# Allegro board 4CHOEI-1.brd
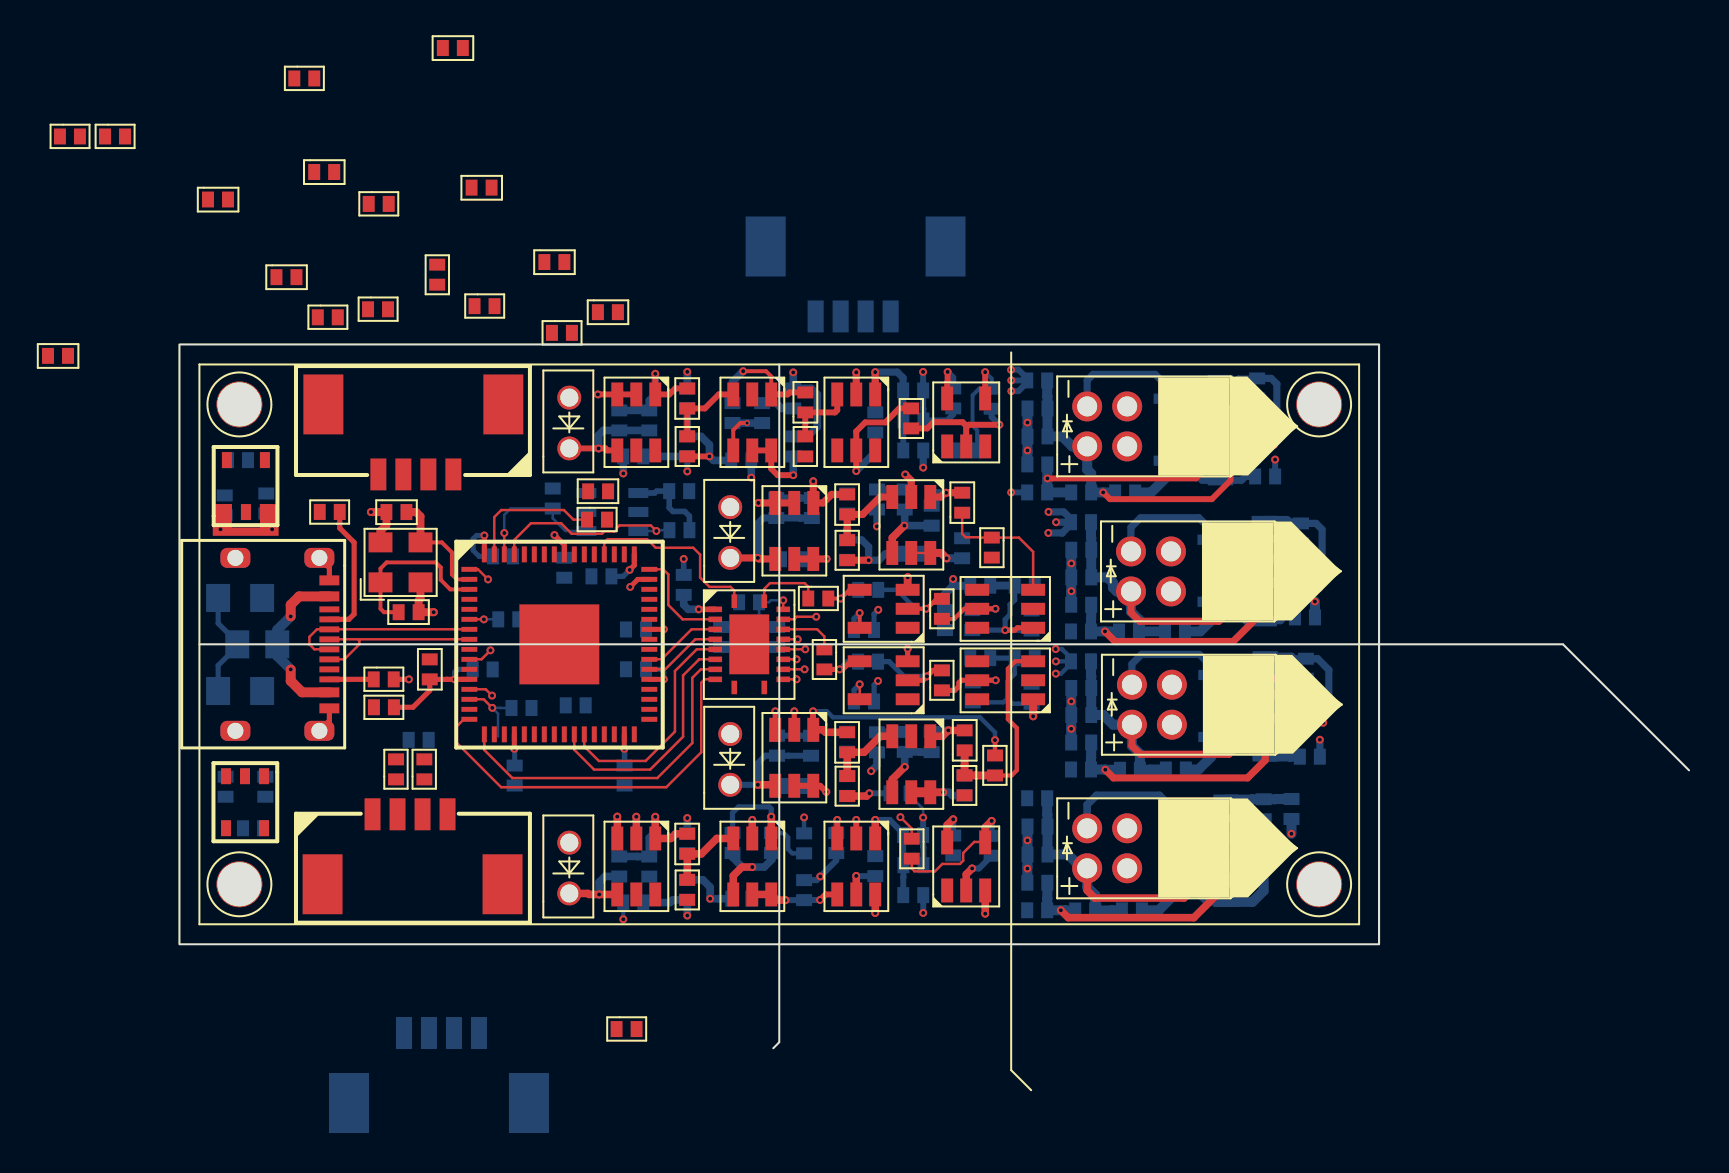
[diagram p0: board, top side]
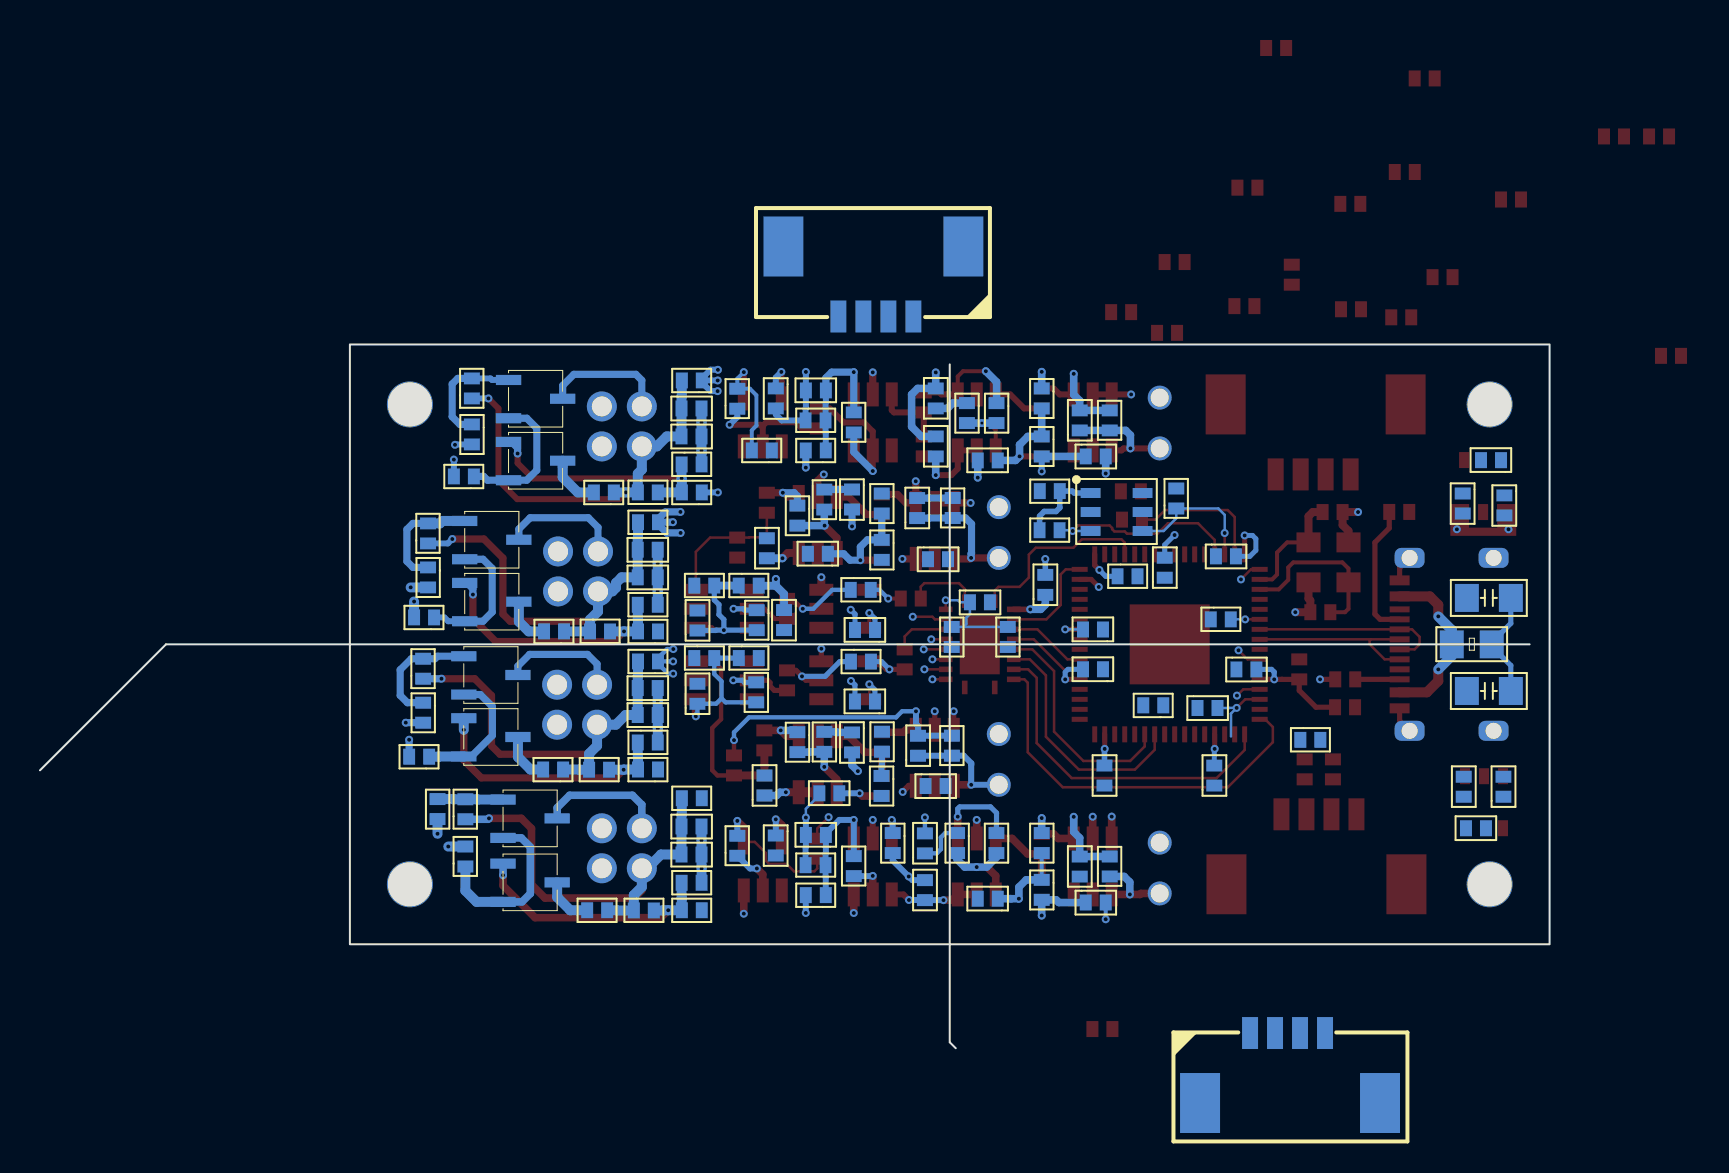
[diagram p1: board, bottom side, seen from below]

Outline 75.5 x 35.2 mm; copper layers: TOP, GND, VCC, BOTTOM. Coordinates in mm from the lower left corner of the outline.
Outline path: rectangle 0,5.2 60,35.2 ; 1,20.2 69.2,20.2 75.5,13.9 ; 30,34.2 30,0.3 29.7,0

## Design rules (mm)
constraint set DEFAULT: min track width 0.127
net group TXD_A: nets N931488 N931856 N931860 N931892 TXD_A
net group TXD_B: nets N931500 N931876 N931880 N931896 TXD_B
net group TXD_C: nets N932344 N932712 N932716 N932748 TXD_C
net group TXD_D: nets N932356 N932732 N932736 N932752 TXD_D

## Placement (name value [footprint] x y rotation side)
C1  27pF  [C0402_SMT]  10.35 26.82 0 top
C2  27pF  [C0402_SMT]  11.96 21.81 180 top
C3  0.1uF  [C0402_SMT]  21.44 27.85 180 top
C4  0.1uF  [C0402_SMT]  4.34 27.75 270 bottom
C5  0.1uF  [C0402_SMT]  2.43 29.41 0 bottom
C6  4.7uF  [C0402_SMT]  12.52 18.45 90 top
C7  0.1uF  [C0402_SMT]  17.61 17.02 180 bottom
C8  0.1uF  [C0402_SMT]  6.74 43.82 0 top
C9  4.7uF  [C0402_SMT]  18.25 39.32 0 top
C10  0.1uF  [C0402_SMT]  13.17 50.03 0 top
C11  4.7uF  [C0402_SMT]  14.61 43.04 0 top
C12  0.1uF  [C0402_SMT]  15.66 18.95 180 bottom
C13  0.1uF  [C0402_SMT]  22.34 18.95 0 bottom
C14  0.1uF  [C0402_SMT]  16.69 24.6 180 bottom
C15  0.1uF  [C0402_SMT]  16.77 13.14 90 bottom
C16  0.1uF  [C0402_SMT]  22.26 13.14 90 bottom
C17  0.1uF  [C0402_SMT]  22.34 20.95 0 bottom
C18  0.1uF  [C0402_SMT]  19.25 23.53 90 bottom
C19  0.1uF  [C0402_SMT]  25.22 22.68 90 bottom
C20  0.1uF  [C0402_SMT]  28.99 22.31 180 bottom
C21  10uF  [C0402_SMT]  45.61 24.93 180 bottom
C22  10uF  [C0402_SMT]  45.61 23.55 180 bottom
C23  10uF  [C0402_SMT]  43.41 30.6 180 bottom
C24  10uF  [C0402_SMT]  43.41 32 180 bottom
C36  DNI  [C0402_SMT]  23.5 30.9 90 bottom
C38  0.1uF  [C0402_SMT]  30.7 32 90 bottom
C39  0.1uF  [C0402_SMT]  30.7 29.6 90 bottom
C42  0.1uF  [C0402_SMT]  31.3 31.8 90 top
C44  0.1uF  [C0402_SMT]  4.85 38.57 0 top
C45  0.1uF  [C0402_SMT]  36.2 32.9 0 bottom
C46  0.1uF  [C0402_SMT]  27.6 29.4 0 bottom
C47  0.1uF  [C0402_SMT]  23.2 29.6 180 bottom
C49  0.1uF  [C0402_SMT]  25.4 33 270 top
C50  0.1uF  [C0402_SMT]  38.7 33 270 bottom
C51  0.1uF  [C0402_SMT]  31.24 9.75 90 bottom
C52  DNI  [C0402_SMT]  23.5 8.59 90 bottom
C53  0.1uF  [C0402_SMT]  31.24 7.41 90 bottom
C54  0.1uF  [C0402_SMT]  36.2 10.67 0 bottom
C56  0.1uF  [C0402_SMT]  23.2 7.29 180 bottom
C57  0.1uF  [C0402_SMT]  38.7 10.64 270 bottom
C59  0.1uF  [C0402_SMT]  -6.57 34.63 0 top
C60  0.1uF  [C0402_SMT]  25.4 10.72 270 top
C62  0.1uF  [C0402_SMT]  1.43 42.45 0 top
C63  0.1uF  [C0402_SMT]  27.6 7.48 0 bottom
C64  10uF  [C0402_SMT]  4.3 12.58 90 bottom
C65  0.1uF  [C0402_SMT]  2.31 12.58 90 bottom
C66  10uF  [C0402_SMT]  2.26 27.65 270 bottom
C67  10uF  [C0402_SMT]  3.18 11 0 bottom
C68  10uF  [C0402_SMT]  43.41 11.09 180 bottom
C69  10uF  [C0402_SMT]  43.41 9.69 180 bottom
C70  10uF  [C0402_SMT]  45.61 18.02 180 bottom
C71  10uF  [C0402_SMT]  45.61 16.67 180 bottom
C72  0.1uF  [C0402_SMT]  34.89 15.8 270 bottom
C73  DNI  [C0402_SMT]  31.59 14.63 90 bottom
C74  0.1uF  [C0402_SMT]  39.27 12.64 90 bottom
C75  0.1uF  [C0402_SMT]  42.62 17.23 90 bottom
C77  0.1uF  [C0402_SMT]  31.21 13.11 180 bottom
C78  0.1uF  [C0402_SMT]  33.74 17.34 0 bottom
C80  0.1uF  [C0402_SMT]  39.27 14.9 90 top
C81  0.1uF  [C0402_SMT]  33.4 15.8 270 top
C83  0.1uF  [C0402_SMT]  20.93 36.82 0 top
C84  0.1uF  [C0402_SMT]  35.52 12.75 0 bottom
C85  0.1uF  [C0402_SMT]  34.89 27.95 270 bottom
C86  DNI  [C0402_SMT]  31.63 26.52 90 bottom
C88  0.1uF  [C0402_SMT]  42.62 20.9 90 bottom
C89  0.1uF  [C0402_SMT]  39.15 24.51 90 bottom
C90  0.1uF  [C0402_SMT]  31.09 24.46 180 bottom
C91  0.1uF  [C0402_SMT]  33.74 20.92 0 bottom
C93  0.1uF  [C0402_SMT]  39.15 26.78 90 top
C94  0.1uF  [C0402_SMT]  33.4 27.7 270 top
C96  0.1uF  [C0402_SMT]  38.29 21.92 270 bottom
C97  0.1uF  [C0402_SMT]  36.09 24.73 0 bottom
C98  22uF  [C0805_SMT]  1.94 17.87 0 bottom
C99  22uF  [C0805_SMT]  1.94 22.52 0 bottom
F1  100mA  [R0805]  4.89 20.2 180 bottom
J2  SIP-1x4  [SMD-1D25-4P-DEG0]  13.7 28.7 180 top
J3  SIP-1x4  [SMD-1D25-4P-DEG0]  31.82 36.6 0 bottom
J4  SIP-1x4  [SMD-1D25-4P-DEG0]  14.98 0.76 180 bottom
J5  SIP-1x4  [SMD-1D25-4P-DEG0]  9.66 11.7 0 top
L1  2.2uH  [L0402_SMT]  -5.97 45.6 0 top
L2  2.2uH  [L0402_SMT]  -3.72 45.6 0 top
LD1  LaserDiode  [AXIAL_2D0_4P]  47.59 22.85 90 top
LD2  LaserDiode  [AXIAL_2D0_4P]  45.4 30.1 90 top
LD3  LaserDiode  [AXIAL_2D0_4P]  45.4 9 90 top
LD4  LaserDiode  [AXIAL_2D0_4P]  47.64 16.18 90 top
NOREF  -  [unnamed]  3 8.2 0 top
NOREF#2  -  [unnamed]  57 32.2 0 top
NOREF#3  -  [unnamed]  57 8.2 0 top
NOREF#4  -  [unnamed]  3 32.2 0 top
PD2  Photodiode  [PD-THR-2P]  19.5 30 90 top
PD3  Photodiode  [PD-THR-2P]  19.5 7.74 90 top
PD4  Photodiode  [PD-THR-2P]  27.55 13.18 90 top
PD5  Photodiode  [PD-THR-2P]  27.55 24.52 90 top
Q2  2SC1815  [SOT23-3]  54.69 26.85 270 bottom
Q3  2SC1815  [SOT23-3]  54.69 23.75 270 bottom
Q4  2SC1815  [SOT23-3]  52.5 30.8 270 bottom
Q5  2SC1815  [SOT23-3]  52.5 33.9 270 bottom
Q6  2SC1815  [SOT23-3]  52.78 9.71 270 bottom
Q7  2SC1815  [SOT23-3]  52.78 12.91 270 bottom
Q8  2SC1815  [SOT23-3]  54.74 16.98 270 bottom
Q9  2SC1815  [SOT23-3]  54.74 20.08 270 bottom
R1  2K  [R0402_SMT]  25.51 25.91 180 bottom
R2  10K  [R0402_SMT]  24.5 27.87 0 bottom
R3  10K  [R0402_SMT]  18.67 27 90 bottom
R4  10K  [R0402_SMT]  20.39 26.44 0 top
R5  12K  [R0402_SMT]  16.95 21.45 180 bottom
R6  10K  [R0402_SMT]  19.32 17.15 0 bottom
R7  DNP  [R0402_SMT]  27.1 21.07 270 bottom
R8  0  [R0402_SMT]  29.9 21.07 270 bottom
R9  5.1K  [R0402_SMT]  44.59 20.85 0 bottom
R17  10K  [R0402_SMT]  27.66 32.27 270 bottom
R20  10K  [R0402_SMT]  29.14 32.27 270 bottom
R21  100K  [R0402_SMT]  25.39 30.6 270 top
R23  4.99K  [R0402_SMT]  25.4 30.6 270 bottom
R24  100K  [R0402_SMT]  31.3 30.6 270 top
R25  4.99K  [R0402_SMT]  25.4 33 270 bottom
R27  1K  [R0402_SMT]  36.6 32 270 top
R31  DNP  [R0402_SMT]  34.8 30.8 90 bottom
R33  560  [R0402_SMT]  56.09 24.05 270 bottom
R34  510  [R0402_SMT]  56.09 25.25 90 bottom
R35  51  [R0402_SMT]  55.79 21.55 0 bottom
R38  510  [R0402_SMT]  47.99 20.85 180 bottom
R43  51  [R0402_SMT]  49.29 20.85 0 bottom
R44  510  [R0402_SMT]  45.6 22.18 180 bottom
R45  510  [R0402_SMT]  45.6 27.8 180 bottom
R46  51  [R0402_SMT]  46.8 27.8 0 bottom
R47  510  [R0402_SMT]  53.9 32.5 90 bottom
R48  5.1K  [R0402_SMT]  42.4 27.8 0 bottom
R49  510  [R0402_SMT]  43.41 29.2 180 bottom
R50  560  [R0402_SMT]  53.9 31.2 270 bottom
R51  51  [R0402_SMT]  53.8 28.6 0 bottom
R66  0  [R0402_SMT]  12.47 15.42 180 bottom
R68  DNI  [R0402_SMT]  22 30.9 90 bottom
R69  4.99K  [R0402_SMT]  36.2 29.9 0 bottom
R70  4.99K  [R0402_SMT]  37.21 31.4 180 bottom
R71  DNP  [R0402_SMT]  40.62 31.99 90 bottom
R72  10K  [R0402_SMT]  29.63 10.76 270 bottom
R73  10K  [R0402_SMT]  27.67 10.76 270 bottom
R74  4.99K  [R0402_SMT]  36.2 7.66 0 bottom
R75  4.99K  [R0402_SMT]  37.21 9.16 180 bottom
R76  DNP  [R0402_SMT]  34.8 8.61 90 bottom
R77  DNI  [R0402_SMT]  22 8.59 90 bottom
R78  1K  [R0402_SMT]  5.75 48.5 0 top
R80  DNP  [R0402_SMT]  40.62 9.63 90 bottom
R81  100K  [R0402_SMT]  32.85 10.76 270 bottom
R82  100K  [R0402_SMT]  25.39 8.42 270 top
R83  4.99K  [R0402_SMT]  25.4 8.42 270 bottom
R84  4.99K  [R0402_SMT]  25.4 10.76 270 bottom
R85  DNP  [R0402_SMT]  21.86 0.96 0 top
R86  DNP  [R0402_SMT]  21.61 23.6 180 bottom
R87  0  [R0402_SMT]  10.73 17.06 180 top
R88  5.1K  [R0402_SMT]  9.72 18.45 0 top
R89  5.1K  [R0402_SMT]  8.02 26.82 180 top
R90  DNP  [R0402_SMT]  42.4 33.4 0 bottom
R91  DNP  [R0402_SMT]  42.4 12.5 0 bottom
R92  510  [R0402_SMT]  45.8 6.89 180 bottom
R93  51  [R0402_SMT]  47.13 6.9 0 bottom
R94  510  [R0402_SMT]  54.23 11.45 90 bottom
R95  5.1K  [R0402_SMT]  42.4 6.9 0 bottom
R96  510  [R0402_SMT]  43.41 8.28 180 bottom
R97  560  [R0402_SMT]  55.62 12.46 270 bottom
R98  51  [R0402_SMT]  54.23 9.09 90 bottom
R99  510  [R0402_SMT]  48.04 13.93 180 bottom
R100  51  [R0402_SMT]  49.34 13.94 0 bottom
R101  510  [R0402_SMT]  56.34 18.48 90 bottom
R102  5.1K  [R0402_SMT]  44.59 13.94 0 bottom
R103  510  [R0402_SMT]  45.6 15.29 180 bottom
R104  560  [R0402_SMT]  56.34 17.28 270 bottom
R105  51  [R0402_SMT]  56.04 14.58 0 bottom
R106  DNP  [R0402_SMT]  44.59 26.31 0 bottom
R107  DNP  [R0402_SMT]  44.59 19.35 0 bottom
R108  DNP  [R0402_SMT]  40.79 13.64 90 top
R109  10K  [R0402_SMT]  36.27 15.82 270 bottom
R110  10K  [R0402_SMT]  37.62 15.81 270 bottom
R111  4.99K  [R0402_SMT]  40.55 19.51 180 bottom
R112  4.99K  [R0402_SMT]  42.78 19.51 180 bottom
R113  DNP  [R0402_SMT]  39.68 18.3 270 bottom
R114  DNI  [R0402_SMT]  29.89 14.63 90 bottom
R115  1K  [R0402_SMT]  38.14 17.9 90 top
R117  DNP  [R0402_SMT]  34.94 19.34 180 bottom
R118  100K  [R0402_SMT]  39.27 13.65 270 top
R119  100K  [R0402_SMT]  33.39 13.61 270 top
R120  4.99K  [R0402_SMT]  33.41 13.62 270 bottom
R121  4.99K  [R0402_SMT]  33.39 15.83 270 bottom
R122  10K  [R0402_SMT]  36.27 27.94 270 bottom
R123  10K  [R0402_SMT]  37.62 27.14 270 bottom
R124  4.99K  [R0402_SMT]  40.55 23.14 180 bottom
R125  4.99K  [R0402_SMT]  42.78 23.14 180 bottom
R126  DNP  [R0402_SMT]  39.66 21.91 270 bottom
R127  DNI  [R0402_SMT]  29.85 26.52 90 bottom
R128  1K  [R0402_SMT]  38.14 21.47 90 top
R130  DNP  [R0402_SMT]  34.95 22.93 180 bottom
R131  100K  [R0402_SMT]  40.63 25.54 270 top
R132  100K  [R0402_SMT]  33.39 25.41 270 top
R133  4.99K  [R0402_SMT]  33.4 25.43 270 bottom
R134  4.99K  [R0402_SMT]  33.4 27.75 270 bottom
R135  DNP  [R0402_SMT]  9.47 42.23 0 top
R136  DNP  [R0402_SMT]  12.89 39.19 270 top
R137  0  [R0402_SMT]  36.63 10.48 270 top
R138  0  [R0402_SMT]  38.9 29.9 0 bottom
R139  0  [R0402_SMT]  32.26 19.95 270 top
R140  0  [R0402_SMT]  31.45 22.49 0 top
R141  DNP  [R0402_SMT]  18.63 35.78 0 top
R142  DNP  [R0402_SMT]  14.76 37.12 0 top
R143  DNP  [R0402_SMT]  6.92 36.56 0 top
R144  DNP  [R0402_SMT]  9.43 36.96 0 top
R145  DNP  [R0402_SMT]  10.84 13.45 90 top
R146  DNP  [R0402_SMT]  12.25 13.45 90 top
U1  FT4232HQ-REEL  [QFN-64-EP]  19 20.2 0 top
U2  93LC56BT-I/OT  [SOT-23-6]  22.95 27.77 180 bottom
U3  TYPE-C 16PIN 2MD(073)  [USB-TYPE-C-16P-SMD-HOR]  7.5 20.2 270 top
U4  XC6220B331MR-G  [SOT-25-5]  3.33 28.12 90 top
U5  TXS0108ERGYR  [VQFN-20]  28.5 20.2 270 top
U14  TLV3501AIDBVR  [SOT-23-6-L2D9-W1D6-PD0D95-CD2D8-MM]  34.8 32.7 270 top
U15  OPA357AIDBVR  [SOT-23-6-L2D9-W1D6-PD0D95-CD2D8-MM]  29.6 32.7 270 top
U17  OPA357AIDBVR  [SOT-23-6-L2D9-W1D6-PD0D95-CD2D8-MM]  23.8 32.7 270 top
U18  SN74AHC1G14DBVR  [SOT-23-5]  38.4 30.1 90 top
U19  TLV3501AIDBVR  [SOT-23-6-L2D9-W1D6-PD0D95-CD2D8-MM]  34.8 10.49 270 top
U20  SN74AHC1G14DBVR  [SOT-23-5]  38.4 7.89 90 top
U21  OPA357AIDBVR  [SOT-23-6-L2D9-W1D6-PD0D95-CD2D8-MM]  29.6 10.49 270 top
U22  OPA357AIDBVR  [SOT-23-6-L2D9-W1D6-PD0D95-CD2D8-MM]  23.8 10.49 270 top
U23  XC6220B181MR  [SOT-25-5]  3.28 12.31 270 top
U24  TLV3501AIDBVR  [SOT-23-6-L2D9-W1D6-PD0D95-CD2D8-MM]  42.7 17.45 180 top
U25  SN74AHC1G14DBVR  [SOT-23-5]  36.42 17.45 180 top
U26  OPA357AIDBVR  [SOT-23-6-L2D9-W1D6-PD0D95-CD2D8-MM]  37.55 15.6 270 top
U27  OPA357AIDBVR  [SOT-23-6-L2D9-W1D6-PD0D95-CD2D8-MM]  31.7 15.93 270 top
U28  TLV3501AIDBVR  [SOT-23-6-L2D9-W1D6-PD0D95-CD2D8-MM]  42.7 21.03 180 top
U29  SN74AHC1G14DBVR  [SOT-23-5]  36.42 21.03 180 top
U30  OPA357AIDBVR  [SOT-23-6-L2D9-W1D6-PD0D95-CD2D8-MM]  37.55 27.57 270 top
U31  OPA357AIDBVR  [SOT-23-6-L2D9-W1D6-PD0D95-CD2D8-MM]  31.7 27.27 270 top
Y1  CRYSTAL-12.0MHz  [SMD2520-4P]  11.06 24.34 0 top

## Library data of the parts
C1-C24 C36 C38 C39 C42 C44-C47 C49-C54 C56 C57 C59 C60 C62-C75 C77 C78 C80 C81 C83-C86 C88-C91 C93 C94 C96-C99 = CAP NP
F1 = FUSE
J2-J5 = SIP-1x4
L1 L2 = INDUCTOR
LD1-LD4 = LaserDiode
PD2-PD5 = Photodiode
Q2-Q9 = 2SC1815
R1-R8 R17 R20 R21 R23-R25 R27 R31 R66 R68-R78 R80-R89 R108-R115 R117-R128 R130-R146 = R
R9 R33 R34 R38 R44 R45 R47-R50 R92 R94-R97 R99 R101-R104 = R: signal model: DEFAULT_RESISTOR_510.000000OHM_2_1
R35 R43 R46 R51 R90 R91 R93 R98 R100 R105-R107 = R: signal model: DEFAULT_RESISTOR_40.000000OHM_2_1
U1 = FT4232HQ-REEL
U2 = 93LC56BT-I/OT
U3 = USB-TYPE-C
U4 = XC6220B331MR-G
U5 = TXS0108ERGYR
U14 U19 U24 U28 = TLV3501AIDBVR
U15 U17 U21 U22 U26 U27 U30 U31 = OPA357AIDBVR
U18 U20 U25 U29 = SN74AHC1G14DBVR
U23 = XC6220B181MR
Y1 = CRYSTAL

## Footprints (pads in the part's own frame, mm; a bottom-side part is the same pattern mirrored in y, then rotated)
AXIAL_2D0_4P
  round 1.5 hole 1: 1(0,0) 2(2,0) 3(0,-2) 4(2,-2)
C0402_SMT
  rect 0.6x0.8 smd: 1(0,0) 2(1,0)
C0805_SMT
  rect 1.2x1.4 smd: 1(0,0) 2(2.2,0)
L0402_SMT
  rect 0.6x0.8 smd: 1(0,0) 2(1,0)
PD-THR-2P
  round 1.2 hole 0.9: 1(0,0) 2(2.54,0)
QFN-64-EP
  rect 0.8x0.25 smd: 1(-4.5,3.75) 2(-4.5,3.25) 3(-4.5,2.75) 4(-4.5,2.25) 5(-4.5,1.75) 6(-4.5,1.25) 7(-4.5,0.75) 8(-4.5,0.25) 9(-4.5,-0.25) 10(-4.5,-0.75) 11(-4.5,-1.25) 12(-4.5,-1.75) 13(-4.5,-2.25) 14(-4.5,-2.75) 15(-4.5,-3.25) 16(-4.5,-3.75) 33(4.5,-3.75) 34(4.5,-3.25) 35(4.5,-2.75) 36(4.5,-2.25) 37(4.5,-1.75) 38(4.5,-1.25) 39(4.5,-0.75) 40(4.5,-0.25) 41(4.5,0.25) 42(4.5,0.75) 43(4.5,1.25) 44(4.5,1.75) 45(4.5,2.25) 46(4.5,2.75) 47(4.5,3.25) 48(4.5,3.75)
  rect 0.25x0.8 smd: 17(-3.75,-4.5) 18(-3.25,-4.5) 19(-2.75,-4.5) 20(-2.25,-4.5) 21(-1.75,-4.5) 22(-1.25,-4.5) 23(-0.75,-4.5) 24(-0.25,-4.5) 25(0.25,-4.5) 26(0.75,-4.5) 27(1.25,-4.5) 28(1.75,-4.5) 29(2.25,-4.5) 30(2.75,-4.5) 31(3.25,-4.5) 32(3.75,-4.5) 49(3.75,4.5) 50(3.25,4.5) 51(2.75,4.5) 52(2.25,4.5) 53(1.75,4.5) 54(1.25,4.5) 55(0.75,4.5) 56(0.25,4.5) 57(-0.25,4.5) 58(-0.75,4.5) 59(-1.25,4.5) 60(-1.75,4.5) 61(-2.25,4.5) 62(-2.75,4.5) 63(-3.25,4.5) 64(-3.75,4.5)
  rect 4x4 smd: 65(0,0)
R0402_SMT
  rect 0.6x0.8 smd: 1(0,0) 2(1,0)
R0805
  rect 1.2x1.4 smd: 1(0,0) 2(2,0)
SMD2520-4P
  rect 1.2x1 smd: 1(-1,-1.04) 2(1,-1.04) 3(1,0.96) 4(-1,0.96)
SMD-1D25-4P-DEG0
  rect 0.8x1.6 smd: 1(0,0) 2(1.25,0) 3(2.5,0) 4(3.75,0)
  rect 2x3 smd: 5(6.5,-3.5) 6(-2.5,-3.5)
SOT23-3
  rect 0.51x1.27 smd: 1(0.476,0.434) 2(2.391,0.434) 3(1.415,3.142)
SOT-23-5
  rect 1.2x0.6 smd: 1(0,0) 2(0,-0.95) 3(0,-1.9) 4(2.4,-1.9) 5(2.4,0)
SOT-23-6
  rect 1x0.5 smd: 1(0,0) 2(0,-0.95) 3(0,-1.9) 4(2.6,-1.9) 5(2.6,-0.95) 6(2.6,0)
SOT-23-6-L2D9-W1D6-PD0D95-CD2D8-MM
  rect 1.2x0.6 smd: 1(0,0) 2(0,-0.95) 3(0,-1.9) 4(2.8,-1.9) 5(2.8,-0.95) 6(2.8,0)
SOT-25-5
  rect 0.8x0.5 smd: 1(-1.3,0.95) 2(-1.3,0) 3(-1.3,-0.95) 4(1.3,-0.95) 5(1.3,0.95)
unnamed
  round 2.3 hole 2.2 unplated: (0,0)
USB-TYPE-C-16P-SMD-HOR
  rect 0.5x1 smd: 1(-3.2,0) 2(-2.4,0) 11(2.4,0) 12(3.2,0)
  rect 0.3x1 smd: 3(-1.75,0) 4(-1.25,0) 5(-0.75,0) 6(-0.25,0) 7(0.25,0) 8(0.75,0) 9(1.25,0) 10(1.75,0)
  rrect 1x1.5 hole 0.8: 13(4.325,-0.5) 14(4.325,-4.7) 15(-4.325,-4.7) 16(-4.325,-0.5)
VQFN-20
  rect 0.68x0.28 smd: 1(-2.157,-0.75) 10(2.158,-0.75) 11(2.158,0.75) 20(-2.157,0.75)
  rect 0.28x0.68 smd: 2(-1.75,-1.7) 3(-1.25,-1.7) 4(-0.75,-1.7) 5(-0.25,-1.7) 6(0.25,-1.7) 7(0.75,-1.7) 8(1.25,-1.7) 9(1.75,-1.7) 12(1.75,1.7) 13(1.25,1.7) 14(0.75,1.7) 15(0.25,1.7) 16(-0.25,1.7) 17(-0.75,1.7) 18(-1.25,1.7) 19(-1.75,1.7)
  rect 3x2 smd: EPAD(0,0)

## Nets
GND: C1.1 C2.1 C3.1 C4.1 C5.2 C6.2 C7.1 C8.1 C9.1 C10.1 C11.1 C12.1 C13.1 C14.1 C15.1 C16.1 C17.1 C18.1 C19.2 C20.2 C21.2 C22.2 C23.2 C24.2 C38.2 C39.2 C44.2 C45.2 C46.2 C47.2 C50.2 C51.2 C53.2 C54.2 C56.2 C57.2 C62.2 C63.2 C64.1 C65.1 C66.1 C67.1 C68.2 C69.2 C70.2 C71.2 C72.2 C74.2 C75.2 C77.2 C78.2 C83.2 C84.2 C85.2 C88.2 C89.2 C90.2 C91.2 C96.2 C97.2 C98.2 C99.2 J2.4 J2.5 J2.6 J3.4 J3.5 J3.6 J4.4 J4.5 J4.6 J5.4 J5.5 J5.6 PD2.2 PD3.2 PD4.2 PD5.2 R5.1 R24.2 R25.1 R33.2 R35.2 R44.2 R49.2 R50.2 R51.2 R66.1 R70.1 R75.1 R81.2 R84.1 R88.2 R89.2 R96.2 R97.2 R98.2 R103.2 R104.2 R105.2 R112.1 R118.2 R121.1 R125.1 R131.2 R134.1 U1.1 U1.5 U1.10 U1.11 U1.15 U1.25 U1.35 U1.47 U1.51 U1.65 U2.2 U3.1 U3.12 U3.13 U3.14 U3.15 U3.16 U4.2(VSS) U5.11 U5.EPAD U14.2(V-) U14.6 U15.2(V-) U17.2(V-) U17.3 U18.3 U19.2(V-) U19.6 U20.3 U21.2(V-) U22.2(V-) U22.3 U23.2(VSS) U24.2(V-) U24.6 U25.3 U26.2(V-) U27.2(V-) U27.3 U28.2(V-) U28.6 U29.3 U30.2(V-) U31.2(V-) U31.3 Y1.2 Y1.4
VBUS: C4.2 C64.2 C65.2 C66.2 C98.1 C99.1 F1.2 U4.1 U4.3 U23.1 U23.3
VBUSIN: F1.1 U3.2 U3.11(VBUS2)
VDD18: C6.1 C12.2 C13.2 C14.2 R7.2 R86.2 R87.1 U1.12 U1.37 U1.64
VDD33: C3.2 C5.1 C15.2 C16.2 C17.2 C18.2 C19.1 C39.1 C44.1 C47.1 C50.1 C53.1 C56.1 C57.1 C62.1 C74.1 C77.1 C78.1 C83.1 C89.1 C90.1 C91.1 C96.1 J2.1 J3.1 J4.1 J5.1 L1.1 L2.1 R2.2 R3.2 R4.2 R6.2 R8.2 R23.2 R69.2 R74.2 R83.2 R90.1 R91.1 R106.1 R107.1 R111.2 R120.2 R124.2 R133.2 U1.20 U1.31 U1.42 U1.50 U1.56 U2.6(VCC) U4.5 U5.2 U5.10 U14.4 U15.5 U15.6 U17.5 U17.6 U18.5 U19.4 U20.5 U21.5 U21.6 U22.5 U22.6 U24.4 U25.5 U26.5 U26.6 U27.5 U27.6 U28.4 U29.5 U30.5 U30.6 U31.5 U31.6
RXD_A: R136.2 R137.1 U5.12
RXD_B: R138.1 R144.2 U5.15
RXD_C: R139.1 R142.2 U5.17
RXD_D: R140.1 R146.2 U5.20
RXDA: U1.17 U5.8
RXDB: U1.27 U5.6
RXDC: U1.39 U5.4
RXDD: U1.52 U5.1
TXD_A: R95.1 R135.2 U5.13
TXD_B: R48.1 R143.2 U5.14
TXD_C: R102.1 R141.2 U5.16
TXD_D: R9.1 R145.2 U5.18
TXDA: U1.16 U5.9
TXDB: U1.26 U5.7
TXDC: U1.38 U5.5
TXDD: U1.48 U5.3
N00582: R4.1 U1.63 U2.5
N00604: R3.1 U1.62 U2.4
N00616: R1.2 U1.61 U2.3
N00760: R1.1 R2.1 U2.1
N01302: U1.8 U3.6 U3.8
N01314: U1.7 U3.5 U3.7
N01942: R86.1 U1.49(VREGOUT)
N02617: R5.2 U1.6
N02788: C7.2 R6.1 U1.14
N03863: C8.2 C9.2 L1.2 U1.9
N03880: C10.2 C11.2 L2.2 U1.4
N15178: C20.1 R7.1 R8.1 U5.19(VCCB)
N619829: R66.2 U1.13
N625108: C36.1 PD2.1 R68.1 U17.4
N625141: C36.2 C49.1 R68.2 U17.1
N797485: R17.2 R20.2 U15.4
N797493: C42.2 R17.1 U15.1
N797585: C45.1 R31.2 R69.1 R70.2 U14.1
N797593: R27.1 R31.1 U14.5
N797877: C42.1 R24.1 U14.3
N797953: C49.2 R21.1 U15.3
N798113: C46.1 R21.2 R23.1 R25.2
N804959: C38.1 R20.1
N809789: R27.2 R71.1 U18.2
N814486: R71.2 R138.2 U18.4(Y)
N820703: C51.1 R72.1
N820707: R72.2 R73.2 U21.4
N820719: C59.2 R73.1 U21.1
N820731: C54.1 R74.1 R75.2 R76.2 U19.1
N820747: C52.1 PD3.1 R77.1 U22.4
N820755: C52.2 C60.1 R77.2 R85.2 U22.1
N820875: R76.1 R78.1 U19.5
N821237: R78.2 R80.1 U20.2
N821249: R80.2 R137.2 U20.4(Y)
N821327: C59.1 R81.1 R85.1 U19.3
N821379: C60.2 R82.1 U21.3
N821555: C63.1 R82.2 R83.1 R84.2
N830568: C67.2 R87.2 U23.5
N884584: R89.1 U3.4
N886048: R88.1 U3.10
N887669: C1.2 U1.2 Y1.3
N887689: C2.2 U1.3 Y1.1
N909852: C73.2 C81.1 R108.2 R114.2 U27.1
N909860: C80.1 R108.1 R118.1 U24.3
N909984: C72.1 R109.1
N909988: R109.2 R110.2 U26.4
N910000: C80.2 R110.1 U26.1
N910012: C75.1 R111.1 R112.2 R113.2 U24.1
N910028: C73.1 PD4.1 R114.1 U27.4
N910156: R113.1 R115.1 U24.5
N910546: R115.2 R117.1 U25.2
N910558: R117.2 R139.2 U25.4(Y)
N910688: C81.2 R119.1 U26.3
N910864: C84.1 R119.2 R120.1 R121.2
N911060: C85.1 R122.1
N911064: R122.2 R123.2 U30.4
N911076: C93.2 R123.1 U30.1
N911088: C88.1 R124.1 R125.2 R126.2 U28.1
N911104: C86.1 PD5.1 R127.1 U31.4
N911112: C86.2 C94.1 R127.2 U31.1
N911232: R126.1 R128.1 U28.5
N911614: R128.2 R130.1 U29.2
N911626: R130.2 R140.2 U29.4(Y)
N911704: C93.1 R131.1 U28.3
N911756: C94.2 R132.1 U30.3
N911932: C97.1 R132.2 R133.1 R134.2
N931488: C68.1 C69.1 LD3.1 R91.2 R92.1 R93.1 R94.1
N931500: C23.1 C24.1 LD2.1 R45.1 R46.1 R47.1 R90.2
N931812: LD3.2 Q7.3
N931828: LD2.2 Q5.3
N931856: Q6.1 R92.2 R95.2 R96.1
N931860: Q6.3 R93.2
N931876: Q4.1 R45.2 R48.2 R49.1
N931880: Q4.3 R46.2
N931892: Q7.1 R94.2 R97.1
N931896: Q5.1 R47.2 R50.1
N932124: Q6.2(E) Q7.2(E) R98.1
N932164: Q4.2(E) Q5.2(E) R51.1
N932344: C70.1 C71.1 LD4.1 R99.1 R100.1 R101.1 R107.2
N932356: C21.1 C22.1 LD1.1 R34.1 R38.1 R43.1 R106.2
N932668: LD4.2 Q9.3
N932684: LD1.2 Q2.3
N932712: Q8.1 R99.2 R102.2 R103.1
N932716: Q8.3 R100.2
N932732: Q3.1 R9.2 R38.2 R44.1
N932736: Q3.3 R43.2
N932748: Q9.1 R101.2 R104.1
N932752: Q2.1 R33.1 R34.2
N932980: Q8.2(E) Q9.2(E) R105.1
N933020: Q2.2(E) Q3.2(E) R35.1
N943640: J2.2 R135.1
N943662: J2.3 R136.1
N943770: J3.2 R141.1
N943792: J3.3 R142.1
N945293: J4.2 R143.1
N945315: J4.3 R144.1
N945423: J5.2 R145.1
N945445: J5.3 R146.1

Pads without a net: LD1 3 4; LD2 3 4; LD3 3 4; LD4 3 4; U1 18 19 21 22 23 24 28 29 30 32 33 34 36 40 41 43 44 45 46 53 54 55 57 58 59 60; U3 3 9; U4 4; U18 1; U20 1; U23 4; U25 1; U29 1

## Via types
v1: diameter 0.4, hole 0.2, TOP to BOTTOM, 153 vias
v2: diameter 0.3, hole 0.15, TOP to BOTTOM, 1 via

## Routing (per net, layer and track width the routed paths; a pad name or vN(x,y) marks a point on that pad's centre or on a via; arc(x,y) is an arc through that point)
GND: length 70.3
  TOP w0.127: U1.10 15.11,19.45 v1(15.56,19.9) ; U1.1 14.94,23.95 v1(15.44,23.45)
  TOP w0.25: v1(22.55,23.07) 22.93,23.45 U1.47
  TOP w0.26: 29.8,15.93 v1(29.8,16.85) ; U3.16 7.5,24.03 U3.1 ; R88.2 v1(11.48,18.45) ; U25.3 v1(36.42,19.98) ; U3.12 7.5,16.38 U3.13 ; U27.2 v1(30.75,16.85)
  TOP w0.3: v1(20.93,32.7) U17.3 U17.2 ; U19.2 v1(33.85,11.42)
  TOP w0.36: v1(36.3,28.7) 36.6,28.4 U30.2 ; U14.2 v1(33.85,33.81) ; U31.2 v1(28.96,27.27)
  TOP w0.38: U19.6 v1(34.8,6.77) ; U22.2 v1(22.85,11.58) ; U22.3 v1(21.9,11.59) ; U20.3 v1(40.3,6.73) ; U21.2 v1(28.65,11.42)
  TOP w0.4: v1(9.58,26.82) C1.1 10.35,26.17 10.06,25.87 Y1.4 ; 36.42,22.93 v1(36.42,23.56) ; Y1.2 12.06,22.49 11.96,22.4 C2.1 v1(12.72,21.81)
  BOTTOM w0.127: v1(37.2,11.54) 37.2,11.98 36.52,12.65 C84.2 ; R44.2 44.6,22.19
  BOTTOM w0.2: C56.2 v1(22.2,6.45)
  BOTTOM w0.22: C51.2 v1(31.24,11.54)
  BOTTOM w0.26: v1(34.95,21.93) 34.74,21.71 C91.2 ; C78.2 34.74,18.17 v1(34.94,18.37)
  BOTTOM w0.28: C19.2 v1(25.22,24.47)
  BOTTOM w0.3: C53.2 31.87,8.41 v1(32.05,8.59) 32.85,9.39 R81.2 ; C50.2 38.7,31.7 38.4,31.4 R70.1 37.21,31.99 37.2,32.01 C45.2 v1(37.2,33.83) ; R75.1 37.21,10.06 37.2,10.08 C54.2 v1(37.2,11.54) ; v1(54.75,30.18) 54.73,30.2 R50.2 ; R51.2 v1(54.8,29.44)
  BOTTOM w0.36: R105.2 v1(57.04,15.43) ; C85.2 v1(34.89,26.1) ; R104.2 v1(57.21,16.28)
  BOTTOM w0.38: R25.1 v1(25.4,33.83) ; R84.1 v1(25.4,11.51) ; C72.2 34.89,14.15 v1(34.59,13.86) ; C47.2 v1(22.2,28.75) ; C39.2 31.42,30.6 31.91,31.08 31.91,32.7 31.61,33 C38.2 v1(30.7,33.8) ; C46.2 v1(28.6,28.54)
  BOTTOM w0.5: C68.2 v1(42.41,10.4) C69.2 42.41,9.1 42.41,9.09 v1(42.41,8.99) R96.2 ; R98.2 v1(55.08,10.09) ; C21.2 v1(44.61,24.25) C22.2 v1(44.61,22.86) 44.61,22.78 44.6,22.78 44.6,22.19 ; R33.2 v1(56.96,23.05) ; R103.2 v1(44.6,15.98) 44.6,16.07 44.61,16.08 C71.2 v1(44.61,17.35) C70.2 ; R97.2 v1(55.62,10.73) ; R49.2 42.41,29.79 42.41,29.8 v1(42.41,29.9) C23.2 v1(42.41,31.29) C24.2 ; R35.2 v1(56.79,22.34)
VBUS: length 5.4
  BOTTOM w0.26: C99.1 1.94,21.25 2.89,20.3 F1.2 2.89,20.1 1.94,19.15 C98.1
  vias: v1(2.06,25.95) v1(4.64,25.95)
VBUSIN: length 8.6
  TOP w0.5: v1(5.57,21.6) 5.57,22.18 5.99,22.6 U3.2 ; v1(5.57,18.95) 5.57,18.37 6.14,17.8 U3.11
  BOTTOM w0.5: v1(5.57,18.95) 4.89,19.62 F1.1 4.89,20.92 v1(5.57,21.6)
VDD18: length 11.3
  TOP w0.25: U1.37 v1(24.23,18.45) ; U1.64 v1(15.25,25.65)
  TOP w0.26: R87.1 11.68,17.06 12.52,17.89 C6.1 13.38,18.45 13.38,18.45 v1(13.77,18.45) U1.12
  BOTTOM w0.25: v1(24.23,18.45) 24.23,18.81 24.09,18.95 C13.2 ; v1(15.25,25.65) 14.86,25.65 14.69,25.48 14.69,24.9 14.99,24.6 C14.2
  BOTTOM w0.26: v1(13.77,18.45) 13.77,18.82 13.9,18.95 C12.2
VDD33: length 54.3
  TOP w0.127: U30.5 U30.6 ; U25.5 v1(34.02,18.2)
  TOP w0.2: U29.5 v1(34.02,21.77)
  TOP w0.25: U1.31 v1(22.25,14.97) ; U1.56 19.25,25.17 v1(18.76,25.67) ; U1.20 v1(16.75,14.97) ; U1.42 v1(24.23,20.95)
  TOP w0.28: U5.2 v1(25.97,21.95)
  TOP w0.3: U18.5 38.4,33.31 38.42,33.33 v1(38.42,33.83) ; U27.5 U27.6 32.05,13.13 v1(32.35,12.82) ; v1(32.04,7.42) 32.32,7.69 U19.4 ; v1(30.7,28.66) 29.92,28.66 29.6,28.98 U15.6 U15.5
  TOP w0.36: U31.5 U31.6 v1(32.37,24.47)
  TOP w0.38: U21.5 U21.6 29.89,7.41 v1(30.31,7.41)
  TOP w0.4: U20.5 38.4,11.15 v1(38.7,11.45) ; v1(38.37,24.51) 38.1,24.77 U30.6 ; 37.55,12.8 v1(38.2,12.8)
  TOP w0.5: 36.6,12.8 37.55,12.8
  BOTTOM w0.127: C17.2 23.83,20.95 23.84,20.95 v1(24.23,20.95)
  BOTTOM w0.22: R107.1 44.59,19.51 44.14,19.96 v1(43.82,19.96) ; R107.1 44.59,19.24 44.09,18.73 v1(43.83,18.73) ; R107.1 v1(43.84,19.35)
  BOTTOM w0.25: v1(16.75,14.97) 16.77,14.96 C15.2 ; C18.2 19.25,25.18 v1(18.76,25.67)
  BOTTOM w0.26: v1(34.02,18.2) 33.74,17.92 C78.1 ; v1(34.02,21.77) 33.74,21.48 C91.1
  BOTTOM w0.28: v1(22.25,14.97) 22.26,14.96 C16.2
  BOTTOM w0.3: R90.1 42.4,33.3 41.97,32.87 v1(41.61,32.87) ; R90.1 v1(41.6,33.4) ; R90.1 42.4,33.5 41.96,33.94 41.6,33.94 v1(41.59,33.93) ; R23.2 v1(25.4,28.85) ; v1(30.31,7.41) C53.1 31.25,7.42 v1(32.04,7.42) ; C50.1 38.7,33.55 v1(38.42,33.83) ; R74.2 v1(37.2,6.77) ; C57.1 v1(38.7,11.45)
  BOTTOM w0.36: v1(37.2,29.04) R69.2 ; v1(43.47,26.82) 44.23,26.82 44.59,26.46 R106.1 ; R106.1 44.59,26.21 44.16,25.78 44.15,25.77 v1(43.46,25.77) ; R106.1 v1(43.85,26.31)
  BOTTOM w0.38: C47.1 R23.2 ; v1(25.4,6.64) R83.2 24.68,7.42 24.54,7.29 C56.1 ; C19.1 25.22,22.18 25.45,21.95 v1(25.97,21.95) ; C74.1 38.66,12.64 38.49,12.8 v1(38.2,12.8) ; C39.1 v1(30.7,28.66)
  BOTTOM w0.4: C96.1 38.29,22.72 38.7,23.13 ; 38.7,23.13 v1(38.7,23.47) ; 38.7,23.13 39.54,23.13 R124.2 ; v1(38.37,24.51) C89.1
RXD_A: length 2
  TOP w0.127: v1(36.06,11.56) 36.63,10.99 R137.1 ; U5.12 v1(30.87,18.45)
RXD_B: length 1.1
  TOP w0.127: U5.15 v1(31.3,19.95)
RXD_C: length 2.9
  TOP w0.127: U5.17 31.9,20.95 32.26,20.59 R139.1
RXD_D: length 3.6
  TOP w0.127: U5.20 29.25,22.97 29.54,23.26 31.27,23.26 31.45,23.08 R140.1
RXDA: length 17.1
  TOP w0.127: U5.8 26.08,18.95 25.65,18.53 25.65,15.27 23.9,13.51 16.65,13.51 15.25,14.92 U1.17
RXDB: length 11.5
  TOP w0.127: U1.27 20.25,15.1 20.98,14.37 23.32,14.37 24.78,15.84 24.78,18.86 25.87,19.95 U5.6
RXDC: length 3.9
  TOP w0.127: U5.4 25.62,20.95 24.11,19.45 U1.39
RXDD: length 9.4
  TOP w0.127: U5.1 27.75,22.89 27.56,23.08 26.51,23.08 26.04,23.54 26.04,24.69 25.7,25.03 23.82,25.03 23.39,25.46 21.42,25.46 21.25,25.29 U1.52
TXD_A: length 1.1
  TOP w0.127: U5.13 v1(31.27,18.95)
TXD_B: length 1.5
  TOP w0.127: U5.14 v1(30.87,19.45)
  BOTTOM w0.3: R48.1 v1(41.6,27.8)
TXD_C: length 0.7
  TOP w0.127: U5.16 v1(30.92,20.45)
TXD_D: length 1.7
  TOP w0.127: U5.18 30.74,21.45 30.87,21.58 v1(31.85,21.58)
TXDA: length 19.7
  TOP w0.127: U1.16 14.22,16.45 13.84,16.07 13.84,15.3 16.09,13.05 24.35,13.05 26.1,14.8 26.1,18.28 26.27,18.45 U5.9
TXDB: length 12.3
  TOP w0.127: U5.7 25.99,19.45 25.19,18.65 25.19,15.58 23.55,13.94 20.74,13.94 19.75,14.93 U1.26
TXDC: length 3.9
  TOP w0.127: U5.5 25.8,20.45 24.3,18.95 U1.38
TXDD: length 5.2
  TOP w0.127: U5.3 25.17,21.45 24.45,22.17 24.45,23.7 24.2,23.95 U1.48
N00582: length 6.8
  TOP w0.127: R4.1 19.71,26.44 19.23,26.92 16.1,26.92 15.75,26.57 U1.63
N00604: length 7
  TOP w0.127: U1.62 v1(16.25,25.77)
  BOTTOM w0.127: U2.4 19.3,25.87 18.67,26.5 R3.1 16.57,27 16.25,26.68 v1(16.25,25.77)
N00616: length 10.3
  TOP w0.127: v1(23.85,25.87) 23.58,26.15 22,26.15 21.88,26.02 21.88,25.96 21.77,25.85 21.25,25.85 21.14,25.74 19.61,25.74 19.09,26.26 17.58,26.26 16.75,25.43 U1.61
  BOTTOM w0.127: R1.2 24.02,25.91 23.98,25.87 v1(23.85,25.87) U2.3
N00760: length 4.3
  BOTTOM w0.28: R1.1 25.51,26.62 25.27,26.85 24.68,26.85 24.5,27.03 R2.1 23.87,27.87 23.78,27.77 U2.1
N01302: length 9.1
  TOP w0.127: U1.8 8.94,20.45 ; 8.94,20.45 9,20.39 9,20.2 8.25,19.45 U3.8 ; 8.94,20.45 U3.6
N01314: length 9.6
  TOP w0.127: U3.7 6.75,19.95 6.5,20.2 6.5,20.57 6.88,20.95 U3.5 U1.7
N01942: length 1.9
  TOP w0.26: U1.49 22.75,24.16 v1(22.52,23.92)
  BOTTOM w0.26: v1(22.52,23.92) 22.2,23.6 R86.1
N02617: length 1.4
  TOP w0.127: U1.6 v1(15.23,21.45)
  BOTTOM w0.127: R5.2 15.94,21.45 v1(15.23,21.45)
N02788: length 3.8
  TOP w0.127: v1(15.65,17.02) 15.22,17.45 U1.14
  BOTTOM w0.127: 15.94,15.6 15.94,16.74 v1(15.65,17.02) 16.04,17.02 16.05,17.02 C7.2
N15178: length 5.9
  TOP w0.127: U5.19 v1(30.2,22.4)
  BOTTOM w0.127: 29.31,21.07 29.17,21.21 29.17,21.54 28.99,21.71 C20.1 29.48,22.31 29.58,22.4 v1(30.2,22.4) ; 29.31,21.07 R7.1 ; 29.31,21.07 R8.1
N619829: length 1.3
  TOP w0.127: v1(15.64,17.64) 15.32,17.95 U1.13
N625108: length 5.7
  TOP w0.3: PD2.1 v1(20.96,30) 21.31,30 21.41,29.9 U17.4
  BOTTOM w0.38: v1(20.96,30) 20.96,30.66 21.2,30.9 R68.1 C36.1
N625141: length 6.2
  TOP w0.3: C49.1 24.8,33 24.5,32.7 U17.1 v1(23.8,33.73)
  BOTTOM w0.38: v1(23.8,33.73) 23.8,32.69 23.5,32.39 C36.2 R68.2
N797485: length 3.3
  TOP w0.2: U15.4 27.7,30.92 28.05,31.27 v2(28.39,31.27)
  BOTTOM w0.38: R17.2 v2(28.39,31.27) R20.2
N797493: length 6
  TOP w0.2: U15.1 29.6,33.6 29.34,33.86 v1(28.2,33.86)
  TOP w0.3: C42.2 30.51,32.8 30.41,32.7 U15.1
  BOTTOM w0.38: R17.1 27.66,33.33 v1(28.2,33.86)
N797585: length 8.3
  TOP w0.36: U14.1 v1(34.8,33.82)
  BOTTOM w0.3: R69.1 36.2,30.8 36.21,30.81 R70.2 36.21,32.29 36.2,32.31 C45.1
  BOTTOM w0.36: R31.2 v1(34.8,33.82) 35.91,33.82 36.2,33.53 C45.1
N797593: length 7.5
  TOP w0.3: R27.1 36,32 35.3,31.3 34.3,31.3 33.85,30.85 U14.5 v1(33.85,28.87)
  BOTTOM w0.36: v1(33.85,28.87) 34.8,29.82 R31.1
N797877: length 3.6
  TOP w0.3: U14.3 32.9,31.91 32.79,31.8 C42.1 R24.1
N797953: length 4
  TOP w0.3: 25.4,30.6 C49.2 26.28,32 26.98,32.7 U15.3
N798113: length 5.5
  TOP w0.3: 25.4,29.6 v1(26.51,29.6)
  BOTTOM w0.38: C46.1 26.71,29.4 v1(26.51,29.6) 26.51,30.18 26.09,30.6 R23.1 R25.2
N804959: length 1.7
  BOTTOM w0.38: R20.1 29.84,32.27 30.11,32 C38.1
N809789: length 6.6
  TOP w0.3: U18.2 39.35,31.06 39.38,31.1 ; 39.38,31.1 39.17,31.31 37.71,31.31 37.4,31 R27.2 ; 39.38,31.1 39.47,31.18 v1(41.01,31.18)
  BOTTOM w0.3: v1(41.01,31.18) 40.62,31.57 R71.1
N814486: length 6.2
  TOP w0.3: U18.4 v1(40.3,33.82)
  BOTTOM w0.2: R138.2 39.9,30.91 39.67,31.14 39.67,32.66 40,32.98 R71.2 40.62,33.49 v1(40.3,33.82)
N820703: length 2.4
  BOTTOM w0.22: C51.1 30.65,9.75 30.44,9.96 30.44,10.54 30.22,10.76 R72.1
N820707: length 4.9
  TOP w0.38: U21.4 27.7,8.63 28.14,9.06 v1(28.65,9.06)
  BOTTOM w0.38: R72.2 29.63,9.45 29.25,9.06 v1(28.65,9.06) 28.15,9.06 27.67,9.55 R73.2
N820719: length 4.6
  TOP w0.38: U21.1 v1(29.6,11.58)
  BOTTOM w0.26: R73.1 27.67,11.25 27.66,11.26 27.66,11.77 27.96,12.07 29.5,12.07 29.6,11.97 v1(29.6,11.58)
N820731: length 7.5
  TOP w0.38: U19.1 v1(34.8,11.42)
  BOTTOM w0.3: R76.2 v1(34.8,11.42) 35.52,11.42 36.2,10.75 C54.1 36.2,9.76 36.21,9.75 R75.2 36.21,8.57 36.2,8.56 R74.1
N820747: length 4.2
  TOP w0.38: PD3.1 20.44,7.74 20.49,7.69 v1(20.99,7.69) U22.4
  BOTTOM w0.38: v1(20.99,7.69) 20.99,8.31 21.28,8.59 R77.1
N820755: length 6.4
  TOP w0.38: C60.1 24.81,10.72 24.58,10.49 U22.1 v1(23.8,11.58)
  BOTTOM w0.38: v1(23.8,11.58) 23.8,10.82 23.5,10.52 C52.2 22.91,9.59 22.9,9.59 R77.2
N820875: length 1.9
  TOP w0.38: U19.5 v1(33.85,8.62)
  BOTTOM w0.3: v1(33.85,8.62) 33.86,8.61 R76.1
N821237: length 2.5
  TOP w0.38: U20.2 39.35,8.7 v1(39.65,8.99)
  BOTTOM w0.3: v1(39.65,8.99) 39.99,8.99 R80.1
N821249: length 7
  TOP w0.127: U20.4 40.27,10.32 39.75,10.32 39.2,9.77 39.2,9.38 39.04,9.22 38.16,9.22 37.79,8.85 36.77,8.85 36.63,8.99 R137.2
  TOP w0.38: v1(40.62,11.37) 40.3,11.05 U20.4
  BOTTOM w0.3: R80.2 v1(40.62,11.37)
N821327: length 1.6
  TOP w0.3: U19.3 v1(32.9,11.42)
  BOTTOM w0.3: v1(32.9,11.42) 32.85,11.37 R81.1
N821379: length 3.9
  TOP w0.38: R82.1 25.39,8.91 25.4,8.92 C60.2 26.11,9.72 26.88,10.49 U21.3
N821555: length 4.3
  BOTTOM w0.2: R83.1 R84.2
  BOTTOM w0.38: C63.1 26.93,7.48 26.93,7.48 v1(26.54,7.48) 26.54,8.06 26.18,8.42 R83.1
N884584: length 6.8
  TOP w0.26: R89.1 8.02,26.01 8.74,25.3 8.74,21.71 8.47,21.45 U3.4
N886048: length 2.2
  TOP w0.26: U3.10 R88.1
N887669: length 6
  TOP w0.2: U1.2 13.87,23.45 13.63,23.69 13.63,24.79 13.12,25.3 Y1.3
  TOP w0.4: Y1.3 12.06,26.6 11.84,26.82 C1.2
N887689: length 8.5
  TOP w0.2: U1.3 13.55,22.95 13.07,23.43 13.07,24.05 12.82,24.3 10.37,24.3 10.06,23.99 Y1.1 10.06,21.98 10.23,21.81 C2.2
N909852: length 16.3
  TOP w0.22: R108.2 v1(40.79,15.41)
  TOP w0.3: 31.69,15.93 v1(31.69,16.85)
  TOP w0.38: U27.1 32.19,15.93 32.32,15.8 C81.1
  BOTTOM w0.22: v1(31.69,16.85) 32.38,16.85 32.69,16.55 40.04,16.55 40.79,15.8 v1(40.79,15.41)
  BOTTOM w0.3: v1(31.69,16.85) 31.69,16.22 31.59,16.12 C73.2 31,15.63 30.99,15.63 R114.2
N909860: length 10.7
  TOP w0.22: U24.3 41.81,19.35 41.44,18.98 41.44,16.46 41.88,16.02 41.88,13.9 41.62,13.64 R108.1
  TOP w0.4: R108.1 39.86,13.64 39.86,13.65 R118.1 39.27,14.14 39.27,14.14 C80.1
N909984: length 1.4
  BOTTOM w0.38: R109.1 35.68,15.82 35.66,15.8 C72.1
N909988: length 3.6
  TOP w0.38: 35.65,12.8 35.65,13.45 v1(36.27,14.07)
  BOTTOM w0.38: R110.2 37.03,14.81 37.02,14.82 R109.2 v1(36.27,14.07)
N910000: length 2.7
  TOP w0.38: C80.2 v1(38.45,15.9) 38.16,15.6 U26.1
  BOTTOM w0.38: R110.1 37.71,15.9 v1(38.45,15.9)
N910012: length 8
  TOP w0.4: U24.1 v1(42.7,16.6)
  BOTTOM w0.22: 41.41,17.5 41.21,17.3 R113.2 ; 41.41,17.5 41.41,18.35 41.78,18.71 R112.2 ; 41.41,17.5 41.68,17.23 41.96,17.23 41.96,17.23 C75.1 42.62,16.74 42.7,16.66 v1(42.7,16.6)
  BOTTOM w0.26: R111.1 R112.2
N910028: length 6.2
  TOP w0.38: 29.79,13.13 29.74,13.18 v1(28.93,13.18)
  BOTTOM w0.127: 27.54,13.18 PD4.1
  BOTTOM w0.3: PD4.1 v1(28.93,13.18) 28.93,14.19 28.92,14.19 28.92,14.26 29.3,14.63 R114.1 30.48,14.63 30.49,14.63 C73.1
N910156: length 4.2
  TOP w0.26: v1(40.83,18.4) U24.5 39.11,18.4 38.99,18.28 38.99,18.11 38.77,17.9 R115.1
  BOTTOM w0.26: v1(40.83,18.4) 40.37,18.4 40.27,18.3 R113.1
N910546: length 4.7
  TOP w0.26: R115.2 37.69,18.9 v1(37.39,18.6) 37.19,18.4 U25.2
  BOTTOM w0.26: R117.1 35.5,19.34 36.23,18.6 v1(37.39,18.6)
N910558: length 3
  TOP w0.26: U25.4 33.58,19.35 33.17,18.95 v1(33.02,18.95) R139.2
  BOTTOM w0.26: v1(33.02,18.95) 33.41,19.34 R117.2
N910688: length 3.8
  TOP w0.38: U26.3 35.05,15.6 34.24,14.8 C81.2 33.4,14.11 33.39,14.1 R119.1
N910864: length 3.4
  TOP w0.38: R119.2 34.37,12.61 v1(34.51,12.75)
  BOTTOM w0.3: R121.2 33.39,14.13 33.41,14.11 R120.1 ; C84.1 v1(34.51,12.75)
N911060: length 1.4
  BOTTOM w0.36: R122.1 35.68,27.94 35.68,27.95 C85.1
N911064: length 3.8
  TOP w0.38: v1(36.26,26.14) 35.65,25.53 U30.4
  BOTTOM w0.38: R122.2 36.27,26.15 v1(36.26,26.14) R123.2
N911076: length 3
  TOP w0.36: U30.1 38.08,27.57 38.29,27.78 v1(38.35,27.78) C93.2
  BOTTOM w0.36: v1(38.35,27.78) 37.79,27.78 37.62,27.62 R123.1
N911088: length 8.1
  TOP w0.26: U28.1 41.91,21.03 41.79,20.91 v1(41.3,20.91)
  BOTTOM w0.26: R125.2 41.78,22.42 41.54,22.19 41.54,21.69 41.3,21.44 v1(41.3,20.91) ; v1(41.3,20.91) 41.69,20.91 41.7,20.9 42.61,20.9 ; v1(41.3,20.91) R126.2
  BOTTOM w0.4: R124.1 R125.2
N911104: length 6.8
  TOP w0.36: PD5.1 v1(28.93,24.52) 28.98,24.47 29.8,24.47
  BOTTOM w0.36: C86.1 31.04,26.52 31.03,26.52 R127.1 29.21,26.52 28.91,26.23 28.91,24.76 28.93,24.74 v1(28.93,24.52)
N911112: length 4.7
  TOP w0.36: C94.1 32.62,27.7 32.19,27.27 U31.1 v1(31.7,28.36)
  BOTTOM w0.36: R127.2 31.03,27.52 31.04,27.52 C86.2
N911232: length 4.1
  TOP w0.22: R128.1 38.75,21.47 39.25,21.98 U28.5
  TOP w0.26: U28.5 v1(40.81,21.98)
  BOTTOM w0.26: v1(40.81,21.98) 40.31,21.98 40.25,21.91 R126.1
N911614: length 4.7
  TOP w0.22: U29.2 v1(37.35,21.98) 37.37,21.98 37.87,22.47 R128.2
  BOTTOM w0.22: R130.1 35.87,22.93 36.82,21.98 v1(37.35,21.98)
N911626: length 2.8
  TOP w0.2: 34.02,22.93 33.52,22.93 v1(33.08,22.49) R140.2
  BOTTOM w0.22: v1(33.08,22.49) 33.51,22.93 R130.2
N911704: length 6.9
  TOP w0.127: 42.7,22.93 42.7,24.83 41.98,25.54 R131.1 40.04,25.54 40.02,25.56 39.32,25.56 39.15,25.72 C93.1
N911756: length 3.9
  TOP w0.36: R132.1 33.39,25.94 33.4,25.94 C94.2 34.17,26.7 35.05,27.57 U30.3
N911932: length 6
  TOP w0.36: R132.2 v1(34.47,24.41)
  BOTTOM w0.36: C97.1 35.31,24.73 34.98,24.41 v1(34.47,24.41) 34.47,25.08 34.12,25.43 R133.1 R134.2
N931488: length 22.1
  TOP w0.38: LD3.1 45.4,7.89 45.78,7.51 50.24,7.51 50.92,8.18 50.92,10.99 51.43,11.5 v1(53.04,11.5)
  BOTTOM w0.38: R94.1 53.09,11.45 v1(53.04,11.5)
  BOTTOM w0.5: R91.2 43.4,11.7 43.41,11.68 C68.1 C69.1 44.44,9.69 45.13,9 LD3.1 45.4,8.06 45.8,7.66 R92.1 46.63,6.89 46.64,6.9 R93.1
N931500: length 20.6
  TOP w0.3: v1(53.07,32.5) 52.57,32 52.57,28.4 51.63,27.46 46.54,27.46 v1(46.2,27.8)
  BOTTOM w0.3: R47.1 v1(53.07,32.5)
  BOTTOM w0.5: R90.2 43.4,32.61 43.41,32.59 C24.1 C23.1 44.15,30.6 44.65,30.1 LD2.1 45.4,28.94 45.6,28.74 R45.1 v1(46.2,27.8) R46.1
N931812: length 6.4
  BOTTOM w0.38: Q7.3 49.63,12.03 49.01,12.65 45.87,12.65 45.4,12.18 LD3.2
N931828: length 6.3
  BOTTOM w0.36: LD2.2 45.4,33.41 45.7,33.71 48.8,33.71 49.36,33.14 Q5.3
N931856: length 13
  TOP w0.38: v1(44.08,6.9) 44.45,6.53 50.74,6.53 52.34,8.14 v1(52.34,8.65)
  BOTTOM w0.38: Q6.1 v1(52.34,8.65)
  BOTTOM w0.5: R92.2 44.31,6.89 44.3,6.9 v1(44.08,6.9) R95.2 43.4,7.49 43.41,7.5 R96.1
N931860: length 2.5
  BOTTOM w0.5: Q6.3 49.63,7.55 48.98,6.9 R93.2
N931876: length 12.5
  TOP w0.3: v1(51.61,29.74) 51.61,29.27 50.85,28.5 v1(43.41,28.5)
  BOTTOM w0.36: Q4.1 51.91,30.32 51.61,30.02 v1(51.61,29.74)
  BOTTOM w0.5: R45.2 R48.2 43.4,28.39 43.41,28.4 v1(43.41,28.5) R49.1
N931880: length 2.7
  BOTTOM w0.5: R46.2 48.6,27.8 49.36,28.56 Q4.3
N931892: length 3.3
  BOTTOM w0.5: R97.1 54.83,12.46 54.82,12.45 R94.2 53.63,12.45 53.62,12.44 Q7.1
N931896: length 5.7
  BOTTOM w0.3: R47.2 52.97,33.5 52.89,33.42 Q5.1
  BOTTOM w0.36: R50.1 54.5,31.2 54.89,31.59 54.89,33.22 54.61,33.5 R47.2
N932124: length 8.7
  BOTTOM w0.38: Q7.2 51.43,10.52 50.98,10.07 50.98,7.73 51.39,7.32 Q6.2
  BOTTOM w0.5: R98.1 54.23,7.88 53.67,7.32 Q6.2
N932164: length 7.2
  BOTTOM w0.36: R51.1 53.31,28.6 53.12,28.41 Q4.2 51.15,28.41 50.65,28.91 50.65,31.01 51.15,31.51 Q5.2
N932344: length 21.6
  TOP w0.36: v1(55.42,18.48) 53.76,18.48 52.92,17.64 52.92,15.13 52.49,14.7 48.06,14.7 47.64,15.13 LD4.1
  BOTTOM w0.36: R101.1 v1(55.42,18.48)
  BOTTOM w0.5: R100.1 48.54,13.94 48.53,13.93 R99.1 48.04,14.73 47.64,15.13 LD4.1 46.7,16.18 46.21,16.67 C71.1 C70.1 45.61,18.61 45.59,18.62 R107.2
N932356: length 21.8
  TOP w0.36: LD1.1 47.59,21.79 48.03,21.36 51.99,21.36 52.35,21.72 52.35,24.52 53.3,25.47 v1(54.88,25.47)
  BOTTOM w0.3: R34.1 55.1,25.25 v1(54.88,25.47)
  BOTTOM w0.5: R43.1 R38.1 47.99,21.44 47.59,21.84 LD1.1 46.87,22.85 46.69,23.03 46.69,23.27 46.41,23.55 C22.1 C21.1 45.61,25.52 45.59,25.54 R106.2
N932668: length 5.9
  BOTTOM w0.36: Q9.3 51.6,19.11 51.01,19.7 48.12,19.7 47.64,19.22 LD4.2
N932684: length 6.1
  BOTTOM w0.36: Q2.3 51.55,25.97 50.98,26.53 48.08,26.53 47.59,26.05 LD1.2
N932712: length 13.4
  TOP w0.36: v1(54.3,15.92) 54.3,14.4 53.42,13.52 46.72,13.52 v1(46.31,13.93)
  BOTTOM w0.5: v1(54.3,15.92) Q8.1 ; R99.2 v1(46.31,13.93) 46.3,13.94 R102.2 45.59,14.53 45.6,14.54 R103.1
N932716: length 2.5
  BOTTOM w0.5: Q8.3 51.6,14.57 50.97,13.94 R100.2
N932732: length 13
  TOP w0.36: v1(53.85,22.69) 53.85,21.49 52.7,20.34 46.8,20.34 v1(46.29,20.85)
  BOTTOM w0.36: 54.26,23.27 54.15,23.27 53.85,22.97 v1(53.85,22.69)
  BOTTOM w0.5: 45.6,22.19 R44.1 45.6,21.45 45.59,21.44 R9.2 v1(46.29,20.85) R38.2
N932736: length 2.5
  BOTTOM w0.5: R43.2 51.06,20.85 51.55,21.34 Q3.3
N932748: length 6
  BOTTOM w0.36: R104.1 57.12,17.28 57.49,17.65 57.49,18.92 56.93,19.48 R101.2 55.75,19.48 55.62,19.61 Q9.1
N932752: length 5.8
  BOTTOM w0.36: R34.2 56.85,26.25 57.15,25.95 57.15,24.35 56.84,24.05 R33.1
  BOTTOM w0.5: 54.26,26.37 55.38,26.37 55.5,26.25 R34.2
N932980: length 6.7
  BOTTOM w0.36: Q8.2 53.92,14.59 52.87,15.64 52.87,17.09 53.48,17.69 Q9.2
  BOTTOM w0.5: R105.1 55.55,14.58 55.54,14.59 Q8.2
N933020: length 6.9
  BOTTOM w0.3: 54.26,21.36 55.08,21.36 55.27,21.55 R35.1
  BOTTOM w0.36: 54.26,24.46 53.34,24.46 52.88,24 52.88,21.82 53.34,21.36 54.26,21.36

## Copper pours and planes (outline as drawn; the poured copper is in the pictures)
VBUS on TOP (solid shape): 2.62,26.04 4.03,26.04 4.03,27.22 4.96,27.22 4.96,25.63 1.67,25.63 1.67,27.22 2.62,27.22
